# Altium PCB MainPCB.PcbDoc
Units mm, origin at the board's own origin, x right, y up, seen from the top; angles counter-clockwise.
Board outline 84.99 x 84.99 mm, 2 copper layers (Top Layer, Bottom Layer), stack 1.272 mm thick; 46 components, 35 nets, 177 pads, 54 vias.
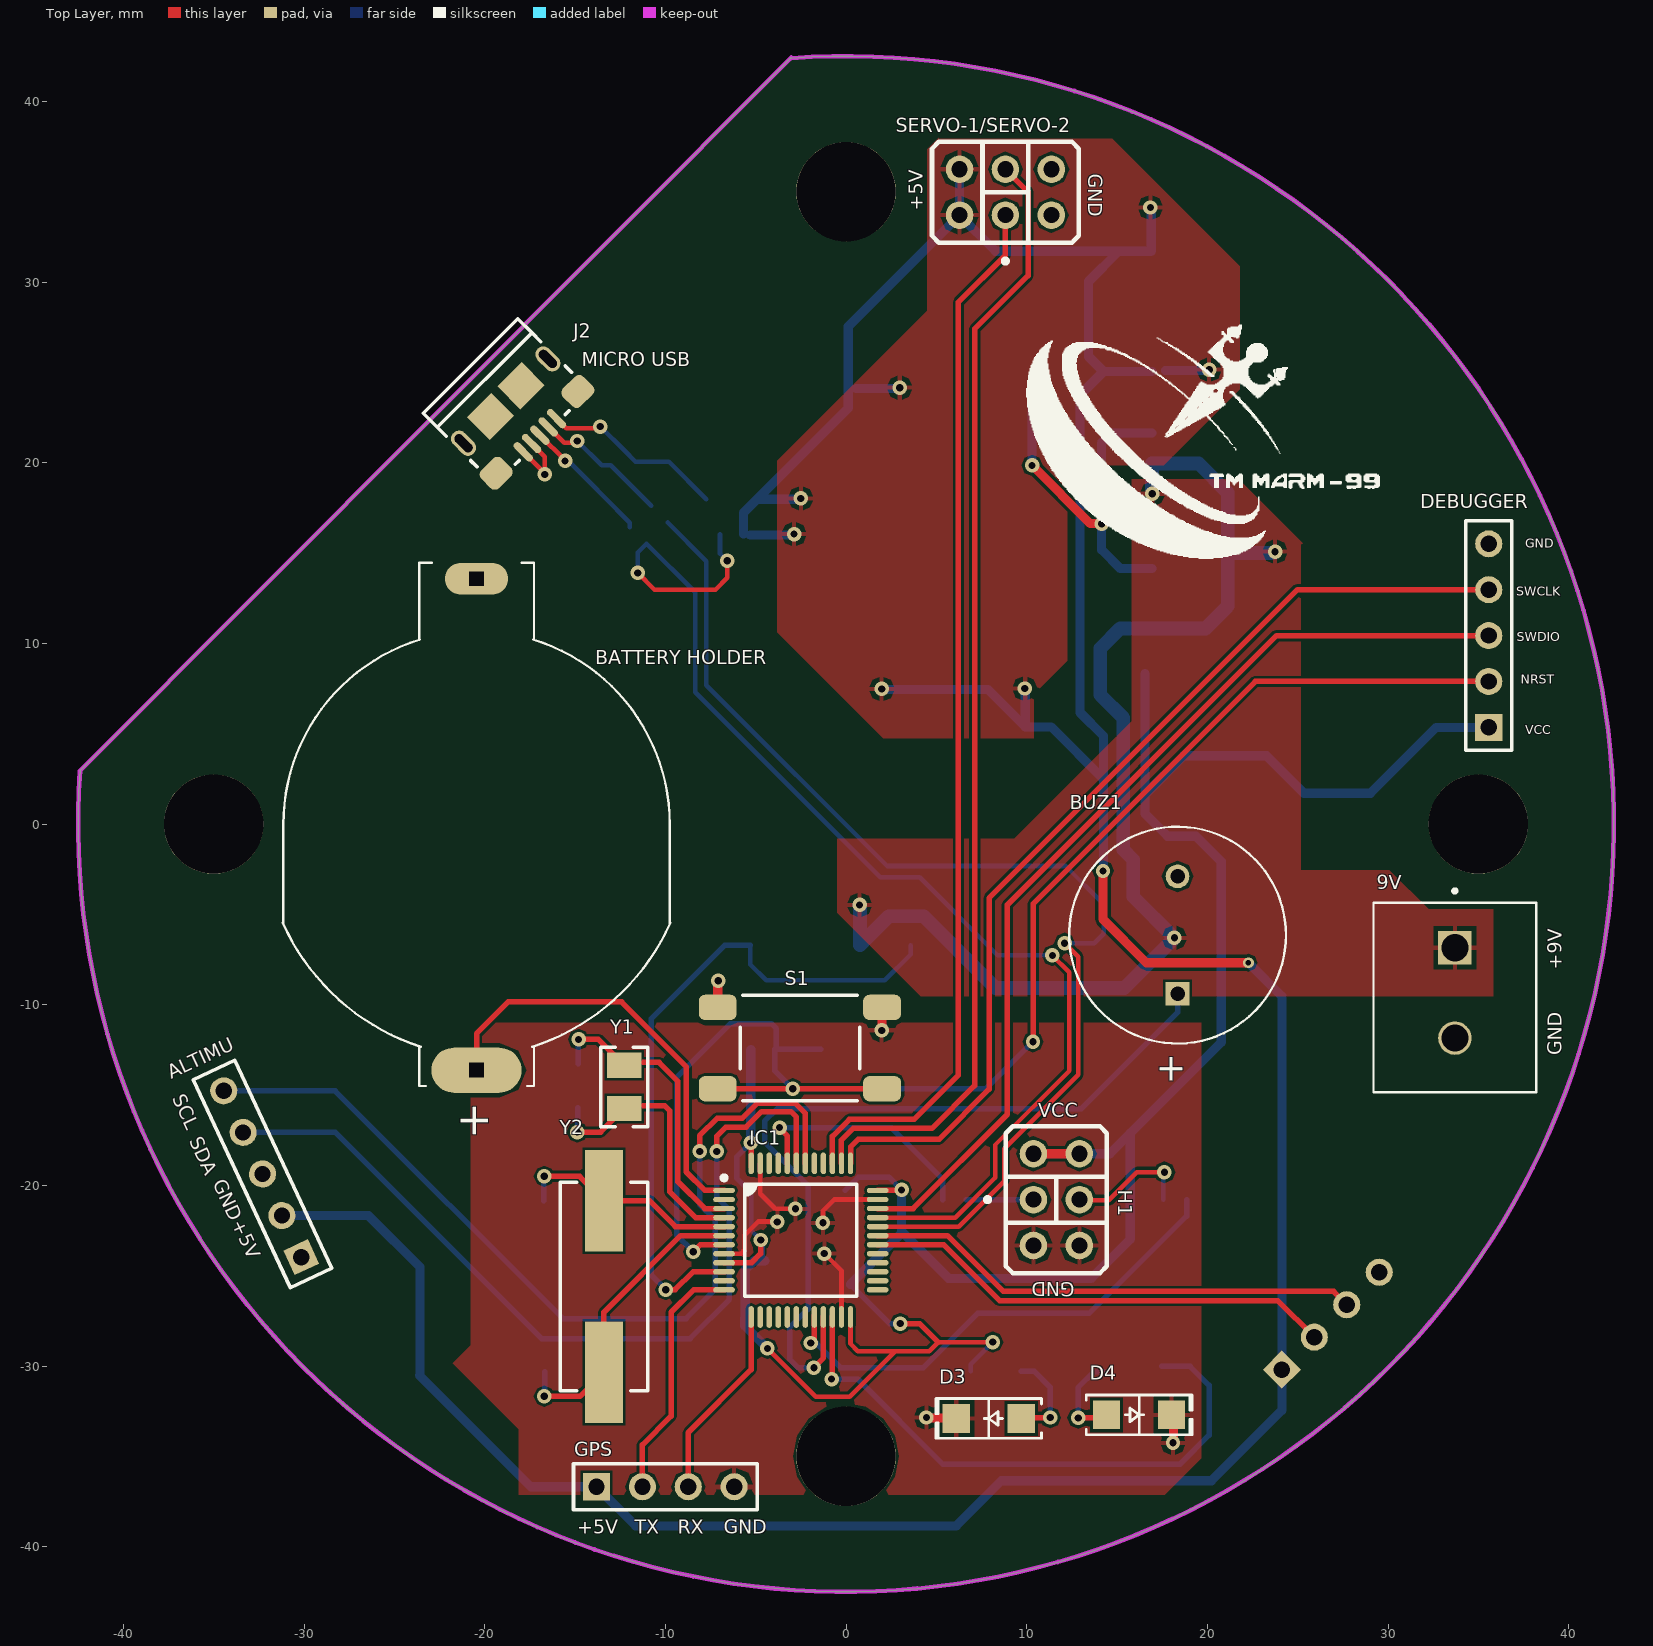
[diagram p0: Top Layer view]
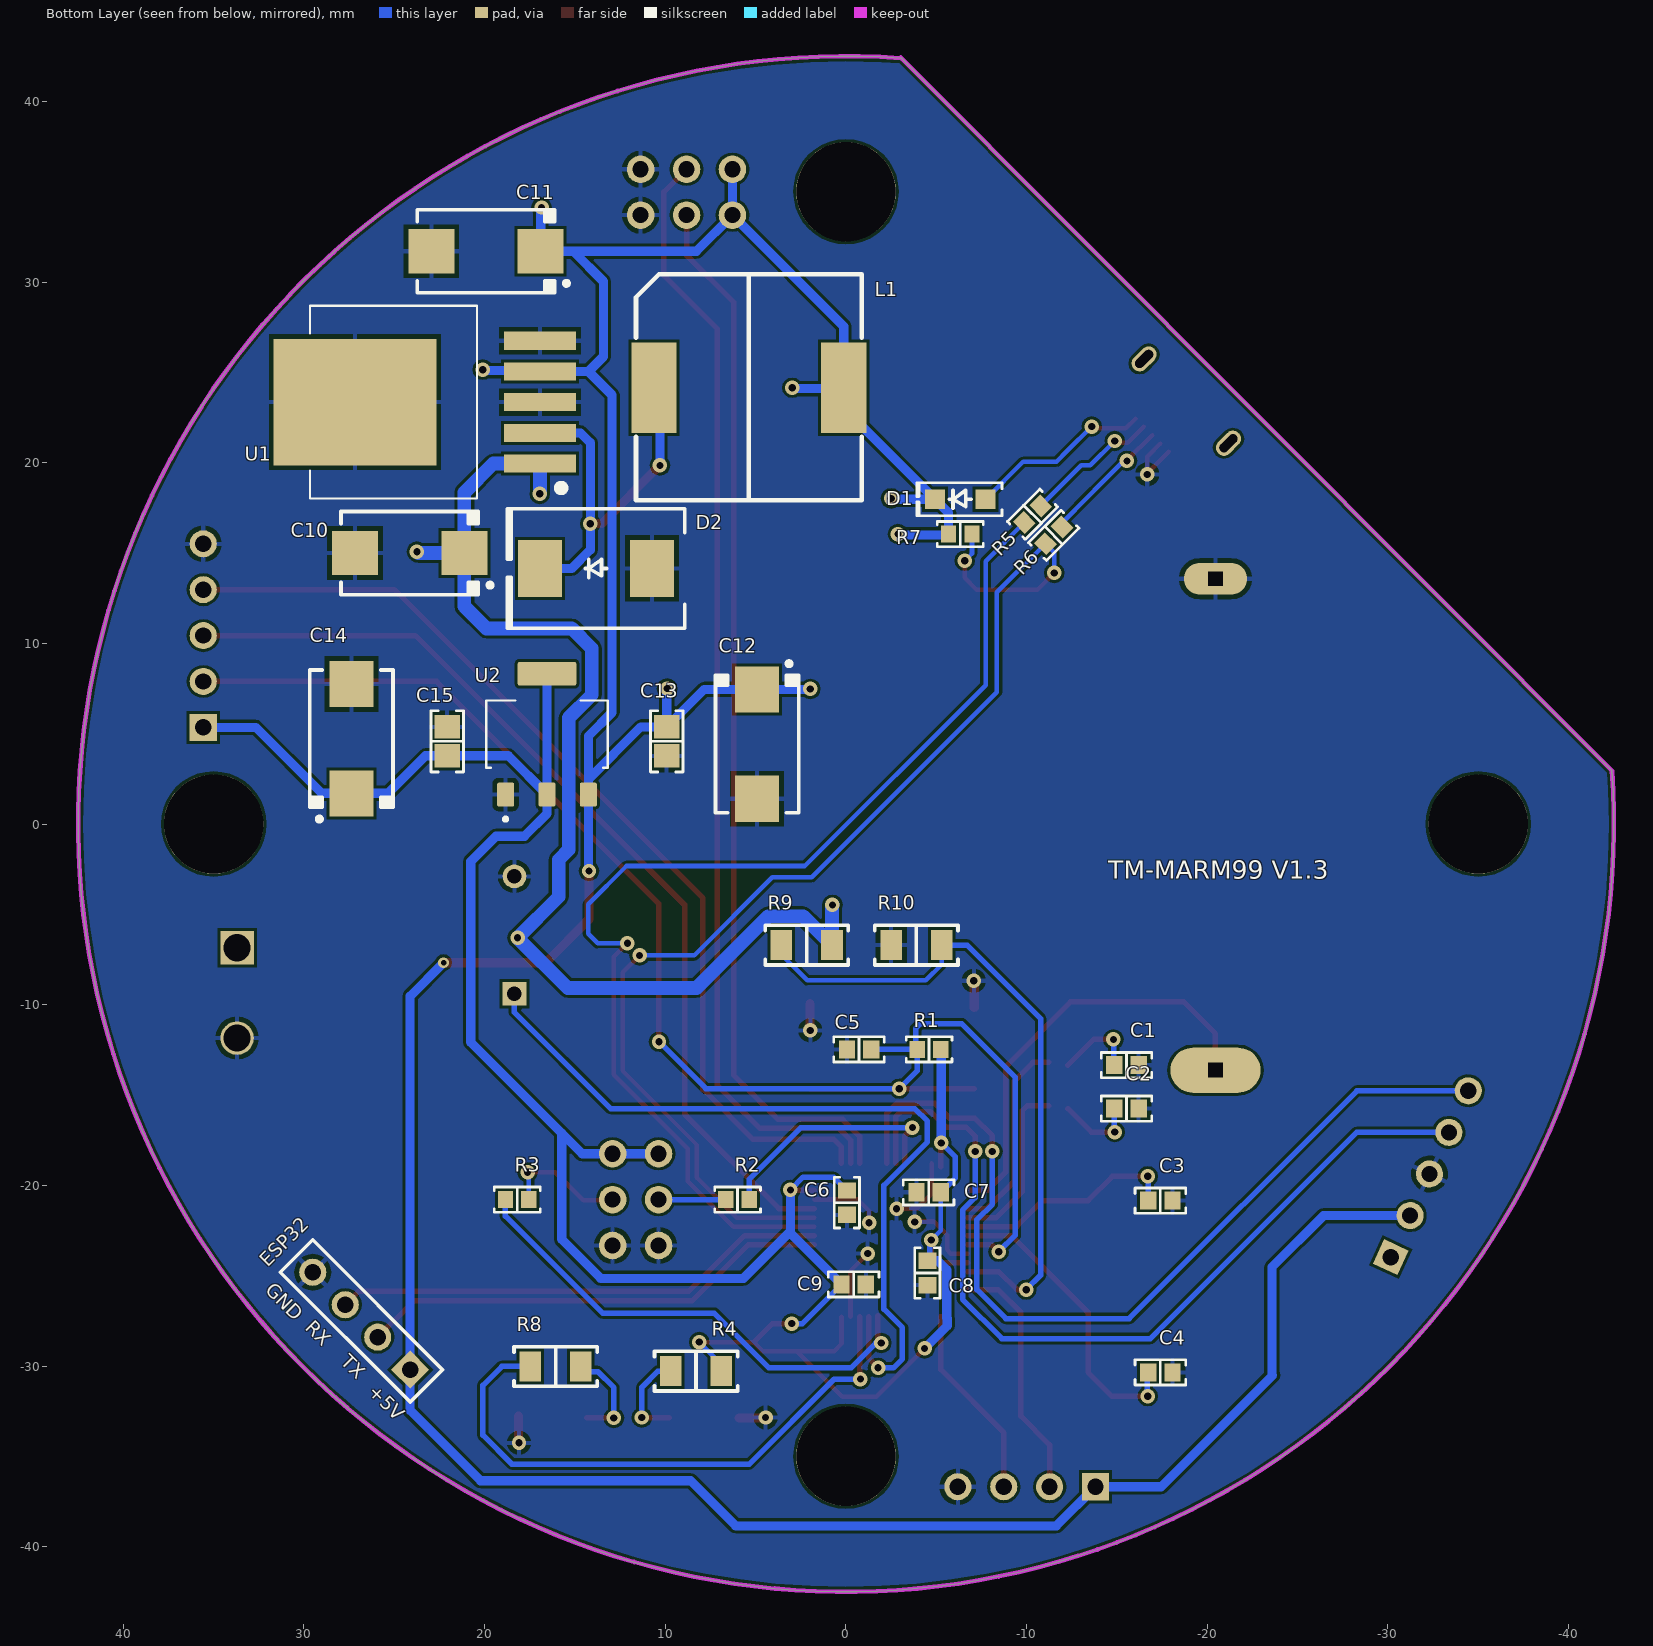
[diagram p1: Bottom Layer view, seen from below]
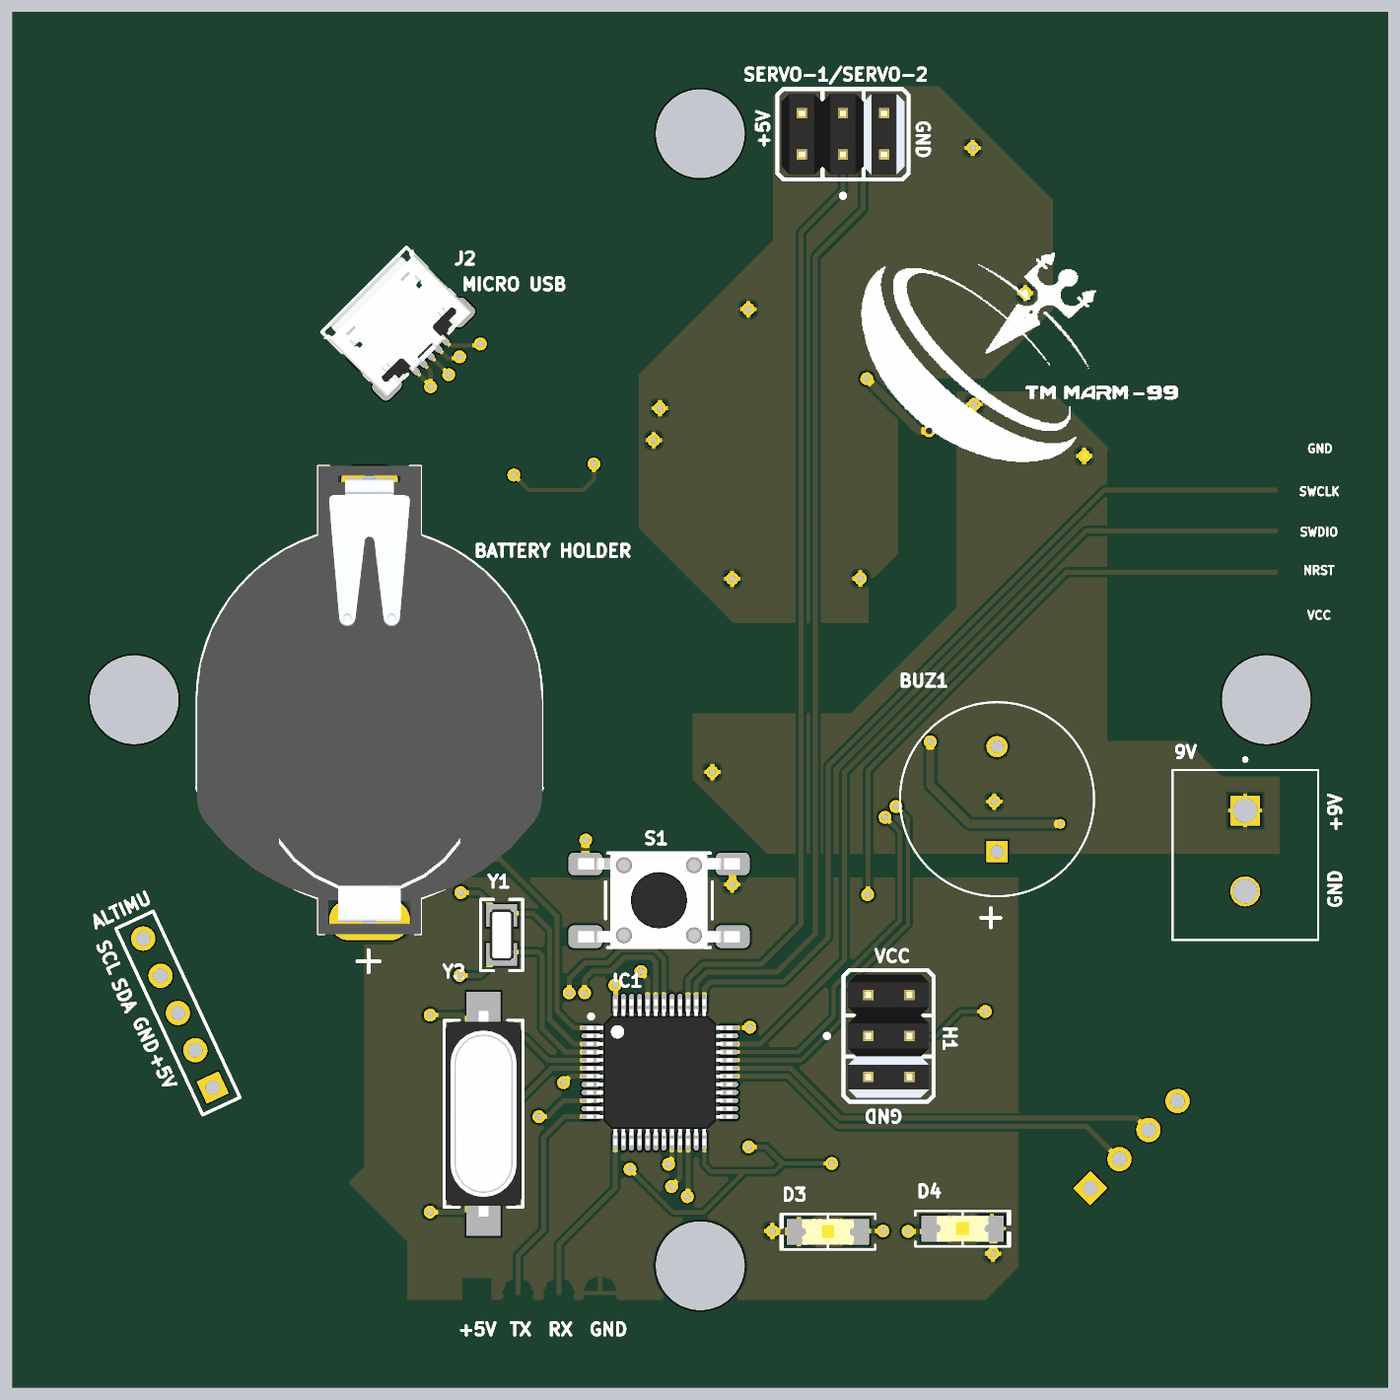
[diagram p2: 3D render of the assembled board from above, using the file's embedded part models]
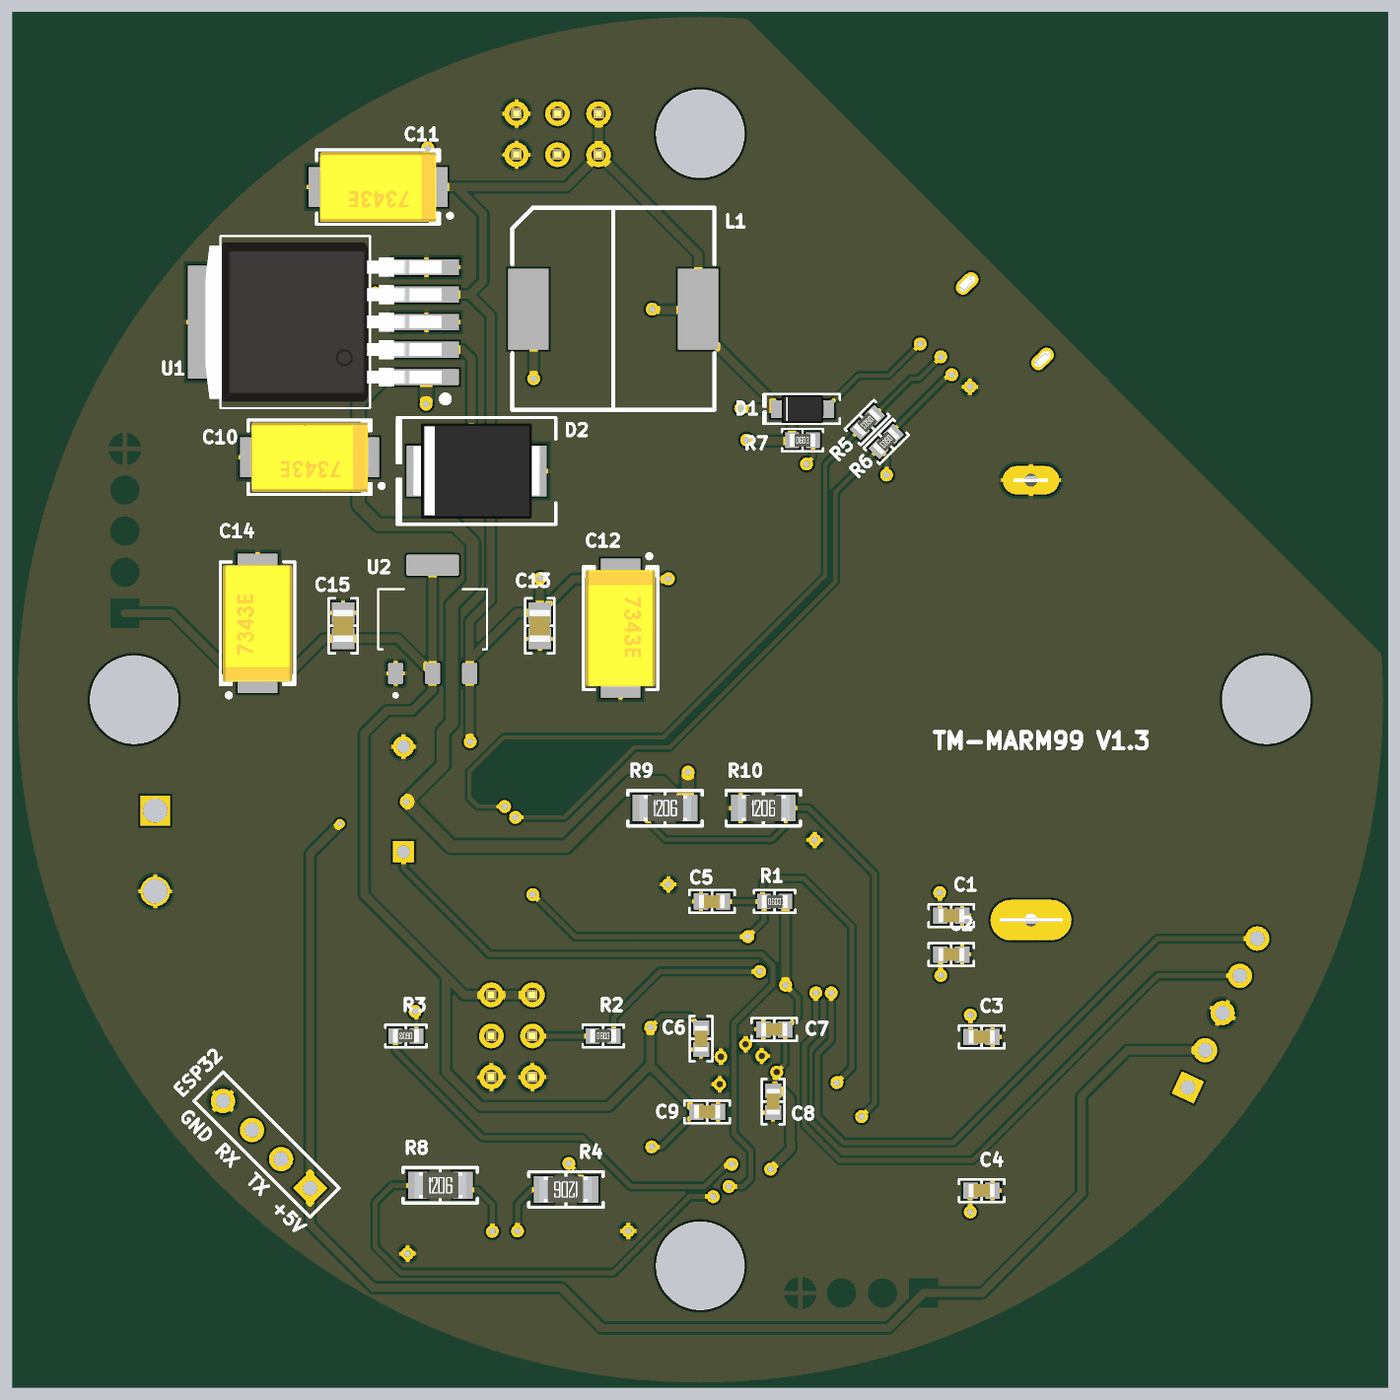
[diagram p3: 3D render of the assembled board from below, using the file's embedded part models]

## Layer stack, top to bottom
Top Solder: solder mask 0.01, Solder Resist, Dk 3.5
Top Layer: signal copper 0.036
Dielectric 1: dielectric 1.2, FR-4, Dk 4.8
Bottom Layer: signal copper 0.036
Bottom Solder: solder mask 0.01, Solder Resist, Dk 3.5

## Board outline
-42.398,2.95 ccw(c0,0) -3.023,42.392 -3.025,42.425

## Design rules (kind name [scope] priority, off if disabled: settings)
Clearance [All] p1: gap=0.152 ignorepadtopadclearanceinfootprint=FALSE
Clearance Polygon_Clearance [InPoly] p2: gap=0.508 ignorepadtopadclearanceinfootprint=FALSE
HoleSize [All] p1: absolutevalues=TRUE maxlimit=5.08 minlimit=0.025 maxpercent=80.000 minpercent=20.000
HoleToHoleClearance [All] p1: gap=0.013 allowstackedmicrovias=TRUE
MinimumSolderMaskSliver [All] p1: minsoldermaskwidth=0.013
PlaneClearance PlaneClearance_1 [All] p1: clearance=0.508
PlaneClearance [All] p2: clearance=1.27
PolygonConnect [All] p1: connectstyle=Relief reliefconductorwidth=0.254 reliefentries=4 polygonreliefangle="90 Angle" airgapwidth=0.254
RoutingVias [All] p1: holewidth=0.4 width=0.8 viastyle="Through Hole" minholewidth=0.1 minwidth=0.2 maxholewidth=0.6 maxwidth=1.2
SilkToSilkClearance [All] p1: silktosilkclearance=0.013
SilkToSolderMaskClearance [IsPad] p1: minsilkscreentomaskgap=0.013 clearancetoexposedcopper=TRUE
SolderMaskExpansion [All] p1: expansion=0.102 istentingtop=FALSE
Width Signal [All] p1: maxlimit=1.27 minlimit=0.203 preferedwidth=0.254 minimp=50.000000 maximp=50.000000 favimp=50.000000
Width [All] p2: maxlimit=0.508 minlimit=0.203 preferedwidth=0.254
24 further rules are at their usual default settings.

## Components (designator, comment, footprint, x,y, rotation, side; value= is the part's Value field where it differs from the comment)
9V "9V TERMINAL" TE_796683-2 33.7,-6.85 r270 top (schematic designator J1)
ALTIMU "ALTIMU" HDR1X5 -30.15,-23.975 r115 top (schematic designator H7)
"BATTERY HOLDER" "BC2032-E2" MPD_BC2032-E2 -20.45,-0.025 r90 top (schematic designator BT)
BUZ1 "MCKPM-G1201A-K4037" XDCR_MCKPM-G1201A-K4037 18.35,-6.15 r90 top
C1 "3.3pF" "CAP 0603_1608" -15.525,-13.35 r0 bottom
C2 "3.3pF" "CAP 0603_1608" -15.525,-15.75 r0 bottom
C3 "27pF" "CAP 0603_1608" -17.4,-20.849 r180 bottom
C4 "27pF" "CAP 0603_1608" -17.4,-30.349 r180 bottom
C5 "0.1µF" "CAP 0603_1608" -0.725,-12.475 r180 bottom
C6 "0.1µF" "CAP 0603_1608" -0.05,-20.959 r90 bottom
C7 "0.1µF" "CAP 0603_1608" -4.575,-20.384 r180 bottom
C8 "0.1µF" "CAP 0603_1608" -4.5,-24.85 r90 bottom
C9 "0.1µF" "CAP 0603_1608" -0.425,-25.484 r0 bottom
C10 "100µF" "CAP POL 2917_7343" 24.15,14.996 r0 bottom
C11 "1000µF" "CAP POL 2917_7343" 19.925,31.704 r0 bottom
C12 "100µF" "CAP POL 2917_7343" 4.925,4.425 r270 bottom
C13 "0.1µF" "CAP 0805_2012" 9.925,4.574 r90 bottom
C14 "330µF" "CAP POL 2917_7343" 27.375,4.724 r90 bottom
C15 "0.1µF" "CAP 0805_2012" 22.075,4.574 r270 bottom
D1 "S110FA" SOD-123W -6.325,17.975 r0 bottom
D2 "B360Q-13-F" "DO214AB SMC" 13.835,14.146 r0 bottom
D3 "Yellow" "LED 1206_3216 YELLOW" 7.9,-32.9 r180 top
D4 "Yellow" "LED 1206_3216 YELLOW" 16.225,-32.7 r0 top
DEBUGGER "DEBUGGER" HDR1X5 35.575,5.35 r90 top (schematic designator H4)
ESP32 "GPS" HDR1X4 24.125,-30.2 r45 bottom (schematic designator H5)
GPS "ESP32" HDR1X4 -13.811,-36.684 r0 top (schematic designator H6)
H1 "2X3 BOOT HDR" "2x3 Male Header" 10.375,-18.25 r0 top
IC1 "STM32F103CBT6" "ST LQFP-48 7X7MM" -2.5,-23.034 r0 top
J2 "10118193-0001LF" "FCI USB 10118193-0001LF" -18.8,23.375 r45 top
L1 "SRI1207" PCBComponent_1 5.375,24.15 r180 bottom
R1 "10 kOhms" "RES 0603_1608" -4.6,-12.475 r180 bottom
R2 "100 kOhms" "RES 0603_1608" 6,-20.79 r180 bottom
R3 "100 kOhms" "RES 0603_1608" 18.2,-20.79 r0 bottom
R4 "510 Ohms" "RES 1206_3216" 8.3,-30.284 r0 bottom
R5 "20 Ohms" "RES 0603_1608" -10.325,17.15 r315 bottom
R6 "20 Ohms" "RES 0603_1608" -11.5,15.975 r315 bottom
R7 "4.7 kOhms" "RES 0603_1608" -6.325,16.05 r180 bottom
R8 "510 Ohms" "RES 1206_3216" 16.075,-30.025 r180 bottom
R9 "2 MOhms" "RES 1206_3216" 2.177,-6.701 r180 bottom
R10 "2 MOhms" "RES 1206_3216" -3.898,-6.701 r180 bottom
S1 "FSM4JSMATR" "TE FSM4JSMA" -2.55,-12.4 r90 top
SERVO-1/SERVO-2 "2X3 SERVO HDR" "2x3 Male Header" 6.285,33.7 r90 top (schematic designator H2)
U1 "LM2576-5.0WU" DPAK6P170_1524X459L254X81N 23.265,23.35 r90 bottom
U2 "AMS1117" SOT229P700X180-4N 16.55,4.975 r90 bottom
Y1 "32.768kHz" "ABRACON ABS07" -12.279,-14.55 r90 top
Y2 "8MHz" "ABRACON ABLS" -13.4,-25.599 r90 top

## Footprints (in the part's own frame and the unit in brackets; to place one, negate y for a bottom-side part, rotate by r counter-clockwise, add the part's x,y. Pads: shape width x height; smd on the part's side, far side on the other; paste and mask are expansions set on the pad)
"2x3 Male Header" [mil]
  round 60 hole 35: 1(0,0) 1(100,0) 2(0,-200) 2(100,-200) 3(0,-100) 4(100,-100)
  silkscreen extent -105,-260 160,60, body extent -48,-250 148,50, height 346
"ABRACON ABLS" [mm] "Crystal, 2-Leads, Body 4.70x11.40mm, Pitch 8.80mm, IPC Medium Density"
  rect 5.6x2.1 smd: 1(-4.75,0) 2(4.75,0)
  silkscreen extent -5.77,-2.43 5.77,2.43, body extent -6.35,-2.35 6.35,2.35, height 4.2
"ABRACON ABS07" [mm] "Crystal, 2-Leads, Body 3.20x1.50mm, IPC Medium Density"
  rect 1.4x1.9 smd: 1(-1.2,0) 2(1.2,0)
  silkscreen extent -2.2,-1.3 2.2,1.3, body extent -1.62,-0.77 1.63,0.78, height 0.9
"CAP 0603_1608" [mm] "Chip Capacitor, 2-Leads, Body 1.60x0.80mm, IPC Medium Density"
  rect 0.9x1 smd: 1(-0.675,0) 2(0.675,0)
  silkscreen extent -1.4,-0.7 1.4,0.7, body extent -0.8,-0.41 0.8,0.41, height 0.82
"CAP 0805_2012" [mm] "Chip Capacitor, 2-Leads, Body 2.00x1.20mm, IPC Medium Density"
  rect 1.3x1.4 smd: 1(-0.8,0) 2(0.8,0)
  silkscreen extent -1.7,-0.9 1.7,0.9, body extent -1,-0.64 1,0.64, height 1.26
"CAP POL 2917_7343" [mm] "Molded Capacitor, 2-Leads, Body 7.30x4.30mm, IPC Medium Density"
  rect 2.55x2.45 smd: 1(-3.025,0) 2(3.025,0)
  silkscreen extent -4.57,-2.3 3.8,2.3, body extent -3.65,-2.15 3.65,2.15, height 4.1
"DO214AB SMC" [mm] "Molded Diode, 2-Leads, Body 6.85x5.90mm, IPC Medium Density"
  rect 2.45x3.15 smd: 1(-3.1,0) 2(3.1,0)
  silkscreen extent -4.9,-3.3 4.9,3.3, body extent -3.97,-2.95 3.97,2.95, height 2.6
DPAK6P170_1524X459L254X81N [mm]
  rect 1x4 smd: 1(-3.4,-6.33) 2(-1.7,-6.33) 3(0,-6.33) 4(1.7,-6.33) 5(3.4,-6.33)
  rect 7x9 smd: 3(0,3.91)
  silkscreen extent -5.33,-7.7 5.33,6.4, body extent -4.91,-7.27 4.91,7.33, height 4.22
"FCI USB 10118193-0001LF" [mm] "USB 2.0 Type B Micro"
  oval 0.4x1.35 smd: 1(1.3,-2.625) 2(0.65,-2.625) 3(0,-2.625) 4(-0.65,-2.625) 5(-1.3,-2.625)
  oval 0.9x1.6 hole 0.5 slot 1.2 at 90 deg: S(-3.3,0.05) S(3.3,0.05)
  rrect50% 1.6x1.4 smd: S(-3.2,-2.4) S(3.2,-2.4)
  rect 1.9x1.8 smd: S(-1.2,0.05) S(1.2,0.05)
  silkscreen extent -3.7,-2.8 3.7,2.8, body extent -3.93,-2.9 3.93,2.76, height 2.78
HDR1X4 [mm] "Connector; Header; 4 Position"
  rect 1.5x1.5 hole 0.9: 1(0,0)
  round 1.5 hole 0.9: 2(2.54,0) 3(5.08,0) 4(7.62,0)
  silkscreen extent -1.27,-1.27 8.89,1.27
HDR1X5 [mm] "Connector; Header; 5 Position"
  rect 1.5x1.5 hole 0.9: 1(0,0)
  round 1.5 hole 0.9: 2(2.54,0) 3(5.08,0) 4(7.62,0) 5(10.16,0)
  silkscreen extent -1.27,-1.27 11.43,1.27
"LED 1206_3216 YELLOW" [mm] "Chip Diode, 2-Leads, Body 3.13x1.55mm, IPC Medium Density"
  rect 1.5x1.6 smd: 1(-1.8,0) 2(1.8,0)
  silkscreen extent -2.92,-1.1 2.92,1.1, body extent -1.6,-0.8 1.6,0.8, height 0.9
MPD_BC2032-E2 [mm]
  oval 1.75x3.5 hole 0.8 square: N(13.6,0)
  oval 2.5x5 hole 0.8 square: P(-13.6,0)
  silkscreen extent -14.48,-10.73 14.48,10.73, body extent -14.48,-10.67 14.48,10.67, height 5.66
PCBComponent_1 [mm]
  rect 2.5x5 smd: 1(-5.25,0) 2(5.25,0)
  silkscreen extent -6.25,-6.23 6.25,6.27
"RES 0603_1608" [mm] "Chip Resistor, 2-Leads, Body 1.60x0.80mm, IPC Medium Density"
  rect 0.85x0.95 smd: 1(-0.65,0) 2(0.65,0)
  silkscreen extent -1.27,-0.7 1.27,0.7, body extent -0.8,-0.4 0.8,0.4, height 0.45
"RES 1206_3216" [mm] "Chip Resistor, 2-Leads, Body 3.13x1.55mm, IPC Medium Density"
  rect 1.2x1.65 smd: 1(-1.4,0) 2(1.4,0)
  silkscreen extent -2.3,-1.1 2.3,1.1, body extent -1.58,-0.8 1.62,0.8, height 0.6
SOD-123W [mm] "SODFL, 2-Leads, Body 1.60x3.50mm, IPC Medium Density"
  rect 1.1x1.1 smd: 1(-1.4,0) 2(1.4,0)
  silkscreen extent -2.31,-0.92 2.41,0.92, body extent -1.75,-0.87 1.75,0.87, height 0.95
SOT229P700X180-4N [mm]
  rrect15% 1.31x0.93 smd: 1(-3.345,2.29) 2(-3.345,0) 3(-3.345,-2.29)
  rrect15% 1.31x3.24 smd: 4(3.345,0)
  silkscreen extent -4.8,-3.36 1.86,3.36
"ST LQFP-48 7X7MM" [mm] "LQFP, 48-Leads, Body 7.00x7.00mm, Pitch 0.50mm, IPC Medium Density"
  oval 1.2x0.3 smd: 1(-4.25,2.75) 2(-4.25,2.25) 3(-4.25,1.75) 4(-4.25,1.25) 5(-4.25,0.75) 6(-4.25,0.25) 7(-4.25,-0.25) 8(-4.25,-0.75) 9(-4.25,-1.25) 10(-4.25,-1.75) 11(-4.25,-2.25) 12(-4.25,-2.75) 25(4.25,-2.75) 26(4.25,-2.25) 27(4.25,-1.75) 28(4.25,-1.25) 29(4.25,-0.75) 30(4.25,-0.25) 31(4.25,0.25) 32(4.25,0.75) 33(4.25,1.25) 34(4.25,1.75) 35(4.25,2.25) 36(4.25,2.75)
  oval 0.3x1.2 smd: 13(-2.75,-4.25) 14(-2.25,-4.25) 15(-1.75,-4.25) 16(-1.25,-4.25) 17(-0.75,-4.25) 18(-0.25,-4.25) 19(0.25,-4.25) 20(0.75,-4.25) 21(1.25,-4.25) 22(1.75,-4.25) 23(2.25,-4.25) 24(2.75,-4.25) 37(2.75,4.25) 38(2.25,4.25) 39(1.75,4.25) 40(1.25,4.25) 41(0.75,4.25) 42(0.25,4.25) 43(-0.25,4.25) 44(-0.75,4.25) 45(-1.25,4.25) 46(-1.75,4.25) 47(-2.25,4.25) 48(-2.75,4.25)
  silkscreen extent -4.37,-3.1 3.1,3.57, body extent -4.51,-4.51 4.51,4.51, height 1.55
"TE FSM4JSMA" [mm]
  rrect50% 1.4x2.1 smd: 1(2.25,4.55) 2(2.25,-4.55) 3(-2.25,4.55) 4(-2.25,-4.55)
  silkscreen extent -2.92,-3.3 2.92,3.3, body extent -3,-5 3,5, height 5.08
TE_796683-2 [mm]
  rect 1.85x1.85 hole 1.5: 1(0,0)
  round 1.85 hole 1.5: 2(5,0)
  silkscreen extent -3.25,-4.5 8,4.5
XDCR_MCKPM-G1201A-K4037 [mm]
  rect 1.308x1.308 hole 0.8: 1(-3.25,0)
  round 1.308 hole 0.8: 2(3.25,0)
  silkscreen extent -6,-6 6,6

## Part data
9V: library part 796683-2, "Wire to Board 2 Position 5 mm Pitch 30-12 AWG Euro Style Terminal Block", Package=None, Availability=Unavailable, MF="TE Connectivity", MP=796683-2, Price=None, SnapEDA_Link=https://www.snapeda.com/parts/796683-2/TE%20Connectivity/view-part/2873073/?ref=snap, TE_purchase_URL=https://www.te.com/usa-en/product-796683-2.html?te_bu=Cor&te_type=disp&te_campaign=seda_glo_cor-seda-global-disp-prtnr-fy19-seda-model-bom-cta_sma-317_1&elqCampaignId=32493
ALTIMU DEBUGGER: library part "Header 5", "1x5 2.54mm Male Header", LatestRevisionDate=17-Jul-2002, LatestRevisionNote="Re-released for DXP Platform.", Publisher="Altium Limited"
"BATTERY HOLDER": "BATTERY HOLDER COIN 20MM PC PIN", Package=None, Availability=Unavailable, MF="MPD _Memory", MP=BC2032-E2, Price=None, SnapEDA_Link=https://www.snapeda.com/parts/BC2032-E2/MPD%20%28Memory%20Protection%20Devices%29/view-part/4219598/?ref=snap
BUZ1: "Zumbador y transductor magnÃ©ticos", Package=None, Availability=Unavailable, MF=Multicomp, MP=MCKPM-G1201A-K4037, Price=None, SnapEDA_Link=https://www.snapeda.com/parts/MCKPM-G1201A-K4037/Multicomp/view-part/231709/?ref=snap
C1 C2: library part 06035U3R3CAT2A, "CAP CER 3.3PF 50V NP0 0603", Device Package="0603 (1608 Metric)", Manufacturer="AVX Corporation", Operating Temperature="-55°C ~ 125°C", Supplier Part Number 1=478-12739-1-ND, Temperature Coefficient="C0G, NP0", Tolerance=±0.25pF, Voltage - Rated=50V, Applications="RF, Microwave, High Frequency", Capacitance=3.3pF, ComponentLink1Description=Datasheet, ComponentLink1URL=http://datasheets.avx.com/U-Series.pdf, ComponentLink2Description="DigiKey Link", ComponentLink2URL=http://digikey.com/product-detail/en/avx-corporation/06035U3R3CAT2A/478-12739-1-ND/9949267, Features="Ultra Low ESR", LastUpdated="2.09.2020 01:03:19", Lifecycle Status=Active, Minimum Order=1, Mounting Type="Surface Mount, MLCC", Package / Case="0603 (1608 Metric)", Packaging=TapeAndReel, Part Number=06035U3R3CAT2A, Part Status=Active, PartId=11763, Price=0.06, Series=U, Size / Dimension="0.060\" L x 0.030\" W (1.52mm x 0.76mm)", Supplier 1=DigiKey, Thickness (Max)="0.036\" (0.91mm)"
C3 C4: library part 600S270FW250XT, "CAP CER 27PF 250V NP0 0603", Device Package="0603 (1608 Metric)", Manufacturer="American Technical Ceramics", Operating Temperature="-55°C ~ 125°C", Supplier Part Number 1=1284-1876-1-ND, Temperature Coefficient="C0G, NP0", Tolerance=±1%, Voltage - Rated=250V, Applications="RF, Microwave, High Frequency, Bypass, Decoupling", Capacitance=27pF, ComponentLink1Description=Datasheet, ComponentLink1URL=http://www.atceramics.com/UserFiles/600s.pdf, ComponentLink2Description="DigiKey Link", ComponentLink2URL=http://digikey.com/product-detail/en/american-technical-ceramics/600S270FW250XT/1284-1876-1-ND/8269410, Features="High Q, Low Loss, Ultra Low ESR", LastUpdated="2.09.2020 01:03:27", Lifecycle Status=Active, Minimum Order=1, Mounting Type="Surface Mount, MLCC", Package / Case="0603 (1608 Metric)", Packaging=TapeAndReel, Part Number=600S270FW250XT, Part Status=Active, PartId=7201, Price=0.49, Series="ATC 600S", Size / Dimension="0.063\" L x 0.032\" W (1.60mm x 0.81mm)", Supplier 1=DigiKey, Thickness (Max)="0.035\" (0.89mm)"
C5 C6 C7 C8 C9: library part 885012206071, "CAP CER 0.1UF 25V X7R 0603", Device Package="0603 (1608 Metric)", Manufacturer="Würth Elektronik", Operating Temperature="-55°C ~ 125°C", Supplier Part Number 1=732-7989-1-ND, Temperature Coefficient=X7R, Tolerance=±10%, Voltage - Rated=25V, Applications="General Purpose", Capacitance=0.1µF, ComponentLink1Description=Datasheet, ComponentLink1URL=https://katalog.we-online.de/pbs/datasheet/885012206071.pdf, ComponentLink2Description="DigiKey Link", ComponentLink2URL=http://digikey.com/product-detail/en/w-rth-elektronik/885012206071/732-7989-1-ND/5454616, LastUpdated="2.09.2020 01:03:30", Lifecycle Status=Active, Minimum Order=1, Mounting Type="Surface Mount, MLCC", Package / Case="0603 (1608 Metric)", Packaging=TapeAndReel, Part Number=885012206071, Part Status=Active, PartId=5665, Price=0.02, Series=WCAP-CSGP, Size / Dimension="0.063\" L x 0.031\" W (1.60mm x 0.80mm)", Supplier 1=DigiKey, Thickness (Max)="0.037\" (0.95mm)"
C10: library part T495X107K016ATE080, "CAP TANT 100UF 10% 16V 2917", Device Package="2917 (7343 Metric)", ESR (Equivalent Series Resistance)=80mOhm, Lifetime @ Temp.="2000 Hrs @ 85°C", Manufacturer=KEMET, Manufacturer Size Code=X, Operating Temperature="-55°C ~ 125°C", Supplier Part Number 1=399-10399-1-ND, Tolerance=±10%, Voltage - Rated=16V, Capacitance=100µF, ComponentLink1Description=Datasheet, ComponentLink1URL=https://api.kemet.com/component-edge/download/datasheet/T495X107K016ATE080.pdf, ComponentLink2Description="DigiKey Link", ComponentLink2URL=http://digikey.com/product-detail/en/kemet/T495X107K016ATE080/399-10399-1-ND/3880218, Features="General Purpose", Height - Seated (Max)="0.169\" (4.30mm)", LastUpdated="2.09.2020 01:16:13", Lifecycle Status=Active, Minimum Order=1, Mounting Type="Surface Mount", Package / Case="2917 (7343 Metric)", Packaging=TapeAndReel, Part Number=T495X107K016ATE080, Part Status=Active, PartId=2918, Price=1.26, Series=T495, Size / Dimension="0.287\" L x 0.169\" W (7.30mm x 4.30mm)", Supplier 1=DigiKey, Type=Molded
C11: library part T491X108K006AT, "CAP TANT 1000UF 10% 6.3V 2917", Device Package="2917 (7343 Metric)", ESR (Equivalent Series Resistance)=600mOhm, Lifetime @ Temp.="2000 Hrs @ 125°C", Manufacturer=KEMET, Manufacturer Size Code=X, Operating Temperature="-55°C ~ 125°C", Supplier Part Number 1=399-5123-1-ND, Tolerance=±10%, Voltage - Rated=6.3V, Capacitance=1000µF, ComponentLink1Description=Datasheet, ComponentLink1URL=https://api.kemet.com/component-edge/download/datasheet/T491X108K006AT.pdf, ComponentLink2Description="DigiKey Link", ComponentLink2URL=http://digikey.com/product-detail/en/kemet/T491X108K006AT/399-5123-1-ND/1681767, Features="General Purpose", Height - Seated (Max)="0.169\" (4.30mm)", LastUpdated="2.09.2020 01:16:11", Lifecycle Status=Active, Minimum Order=1, Mounting Type="Surface Mount", Package / Case="2917 (7343 Metric)", Packaging=TapeAndReel, Part Number=T491X108K006AT, Part Status=Active, PartId=3349, Price=2.10, Series=T491, Size / Dimension="0.287\" L x 0.169\" W (7.30mm x 4.30mm)", Supplier 1=DigiKey, Type=Molded
C12: library part TR3D107K020C0080, "CAP TANT 100UF 10% 20V 2917", Device Package="2917 (7343 Metric)", ESR (Equivalent Series Resistance)=80mOhm, Manufacturer="Vishay Sprague", Manufacturer Size Code=D, Operating Temperature="-55°C ~ 125°C", Supplier Part Number 1=718-1774-1-ND, Tolerance=±10%, Voltage - Rated=20V, Capacitance=100µF, ComponentLink1Description=Datasheet, ComponentLink1URL=http://www.vishay.com/docs/40080/tr3.pdf, ComponentLink2Description="DigiKey Link", ComponentLink2URL=http://digikey.com/product-detail/en/vishay-sprague/TR3D107K020C0080/718-1774-1-ND/2260028, Features="General Purpose", Height - Seated (Max)="0.122\" (3.10mm)", LastUpdated="2.09.2020 01:16:12", Lifecycle Status=Active, Minimum Order=1, Mounting Type="Surface Mount", Package / Case="2917 (7343 Metric)", Packaging=TapeAndReel, Part Number=TR3D107K020C0080, Part Status=Active, PartId=3089, Price=0.61, Series="TANTAMOUNT®, TR3", Size / Dimension="0.287\" L x 0.169\" W (7.30mm x 4.30mm)", Supplier 1=DigiKey, Type=Molded
C13 C15: library part AC0805KKX8R9BB104, "CAP CER 0805 10% X8R 50V 100NF", Device Package="0805 (2012 Metric)", Manufacturer=Yageo, Operating Temperature="-55°C ~ 150°C", Ratings=AEC-Q200, Supplier Part Number 1=311-4624-1-ND, Temperature Coefficient=X8R, Tolerance=±10%, Voltage - Rated=50V, Applications=Automotive, Capacitance=0.1µF, ComponentLink1Description=Datasheet, ComponentLink1URL=http://www.yageo.com/documents/recent/AC0805KKX8R9BB104.pdf, ComponentLink2Description="DigiKey Link", ComponentLink2URL=http://digikey.com/product-detail/en/yageo/AC0805KKX8R9BB104/311-4624-1-ND/9699550, LastUpdated="2.09.2020 01:04:20", Lifecycle Status=Active, Minimum Order=1, Mounting Type="Surface Mount, MLCC", Package / Case="0805 (2012 Metric)", Packaging=TapeAndReel, Part Number=AC0805KKX8R9BB104, Part Status=Active, PartId=14076, Price=0.06, Series=AC, Size / Dimension="0.079\" L x 0.049\" W (2.00mm x 1.25mm)", Supplier 1=DigiKey, Thickness (Max)="0.057\" (1.45mm)"
C14: library part T494D337K006AT, "CAP TANT 330UF 10% 6.3V 2917", Device Package="2917 (7343 Metric)", ESR (Equivalent Series Resistance)=150mOhm, Lifetime @ Temp.="2000 Hrs @ 125°C", Manufacturer=KEMET, Manufacturer Size Code=D, Operating Temperature="-55°C ~ 125°C", Supplier Part Number 1=399-10434-1-ND, Tolerance=±10%, Voltage - Rated=6.3V, Capacitance=330µF, ComponentLink1Description=Datasheet, ComponentLink1URL=https://api.kemet.com/component-edge/download/datasheet/T494D337K006AT.pdf, ComponentLink2Description="DigiKey Link", ComponentLink2URL=http://digikey.com/product-detail/en/kemet/T494D337K006AT/399-10434-1-ND/3907839, Features="General Purpose", Height - Seated (Max)="0.122\" (3.10mm)", LastUpdated="2.09.2020 01:16:17", Lifecycle Status=Active, Minimum Order=1, Mounting Type="Surface Mount", Package / Case="2917 (7343 Metric)", Packaging=TapeAndReel, Part Number=T494D337K006AT, Part Status=Active, PartId=2266, Price=2.20, Series=T494, Size / Dimension="0.287\" L x 0.169\" W (7.30mm x 4.30mm)", Supplier 1=DigiKey, Type=Molded
D1: "DIODE SCHOTTKY 100V 1A SOD123FA", Capacitance @ Vr, F="55pF @ 4V, 1MHz", Current - Average Rectified (Io)=1A, Current - Reverse Leakage @ Vr="50µA @ 100V", Manufacturer="ON Semiconductor", Operating Temperature - Junction="-55°C ~ 150°C", Package / Case=SOD-123W, Supplier Device Package=SOD-123FA, Supplier Part Number 1=S110FACT-ND, Voltage - DC Reverse (Vr) (Max)=100V, Voltage - Forward (Vf) (Max) @ If="800mV @ 1A", ComponentLink1Description=Datasheet, ComponentLink1URL=https://www.onsemi.com/pub/Collateral/S110FA-D.pdf, ComponentLink2Description="DigiKey Link", ComponentLink2URL=http://digikey.com/product-detail/en/on-semiconductor/S110FA/S110FACT-ND/5892121, Diode Type=Schottky, LastUpdated="2.09.2020 01:30:30", Lifecycle Status=Active, Minimum Order=1, Mounting Type="Surface Mount", Packaging=TapeAndReel, Part Number=S110FA, Part Status=Active, PartId=3121, Price=0.07, Series="Automotive, AEC-Q101", Speed="Fast Recovery =< 500ns, > 200mA (Io)", Supplier 1=DigiKey
D2: "DIODE SCHOTTKY 60V 3A SMC", Capacitance @ Vr, F="200pF @ 4V, 1MHz", Current - Average Rectified (Io)=3A, Current - Reverse Leakage @ Vr="500µA @ 60V", Manufacturer="Diodes Incorporated", Operating Temperature - Junction="-55°C ~ 150°C", Package / Case="DO-214AB, SMC", Supplier Device Package=SMC, Supplier Part Number 1=B360Q-13-FDICT-ND, Voltage - DC Reverse (Vr) (Max)=60V, Voltage - Forward (Vf) (Max) @ If="700mV @ 3A", ComponentLink1Description=Datasheet, ComponentLink1URL=https://www.diodes.com/assets/Datasheets/B320Q-B360Q.pdf, ComponentLink2Description="DigiKey Link", ComponentLink2URL=http://digikey.com/product-detail/en/diodes-incorporated/B360Q-13-F/B360Q-13-FDICT-ND/6012769, Diode Type=Schottky, LastUpdated="2.09.2020 01:18:57", Lifecycle Status=Active, Minimum Order=1, Mounting Type="Surface Mount", Packaging=TapeAndReel, Part Number=B360Q-13-F, Part Status=Active, PartId=1652, Price=0.16, Series="Automotive, AEC-Q101", Speed="Fast Recovery =< 500ns, > 200mA (Io)", Supplier 1=DigiKey
D3 D4: library part FKY1105W-TR, "LED YELLOW CLEAR SMD", Current - Test=20mA, Device Package="1206 (3216 Metric)", Lens Color=Colorless, Manufacturer="Stanley Electric Co", Millicandela Rating=2850mcd, Supplier Device Package="3216 (1206)", Supplier Part Number 1=404-1272-1-ND, Voltage - Forward (Vf) (Typ)=2.2V, Color=Yellow, ComponentLink1Description=Datasheet, ComponentLink1URL=http://www.stanley-components.com/php/downloaddatafile.php?rp=0,FKY1105W-TR_e.pdf, ComponentLink2Description="DigiKey Link", ComponentLink2URL=http://digikey.com/product-detail/en/stanley-electric-co/FKY1105W-TR/404-1272-1-ND/9477277, Configuration=Standard, Height (Max)=2.05mm, LastUpdated="2.09.2020 01:21:25", Lens Size="1.60mm Dia", Lens Style="Round with Domed Top", Lens Transparency=Clear, Lifecycle Status=Active, Minimum Order=1, Mounting Type="Surface Mount", Package / Case="1206 (3216 Metric)", Packaging=TapeAndReel, Part Number=FKY1105W-TR, Part Status=Active, PartId=35, Price=0.14, Series=1105W, Size / Dimension="3.20mm L x 1.60mm W", Supplier 1=DigiKey, Wavelength - Dominant=589nm, Wavelength - Peak=595nm
ESP32 GPS: library part "Header 4", "1x4 2.54mm Male Header", LatestRevisionDate=17-Jul-2002, LatestRevisionNote="Re-released for DXP Platform.", Publisher="Altium Limited"
IC1: "IC MCU 32BIT 128KB FLASH 48LQFP", Device Package=48-LQFP, Manufacturer=STMicroelectronics, Operating Temperature="-40°C ~ 85°C (TA)", Supplier Part Number 1=497-6288-ND, Voltage - Supply (Vcc/Vdd)="2V ~ 3.6V", ComponentLink1Description=Datasheet, ComponentLink1URL=https://www.st.com/resource/en/datasheet/stm32f103cb.pdf, ComponentLink2Description="DigiKey Link", ComponentLink2URL=http://digikey.com/product-detail/en/stmicroelectronics/STM32F103CBT6/497-6288-ND/1754420, Connectivity="CANbus, I²C, IrDA, LINbus, SPI, UART/USART, USB", Core Processor="ARM® Cortex®-M3", Core Size=32-Bit, Data Converters="A/D 10x12b", LastUpdated="24.05.2020 22:49:18", Lifecycle Status=Active, Minimum Order=1, Mounting Type="Surface Mount", Number of I/O=37, Oscillator Type=Internal, Package / Case=48-LQFP, Packaging=Tray, Part Number=STM32F103CBT6, Part Status=Active, PartId=194, Peripherals="DMA, Motor Control PWM, PDR, POR, PVD, PWM, Temp Sensor, WDT", Price=5.25, Program Memory Size="128KB (128K x 8)", Program Memory Type=FLASH, RAM Size="20K x 8", Series=STM32F1, Speed=72MHz, Supplier 1=DigiKey
J2: "CONN RCPT USB2.0 MICRO B SMD R/A", Current Rating (Amps)="1.8A per Contact", Manufacturer="Amphenol ICC (FCI)", Operating Temperature="-30°C ~ 80°C", Supplier Part Number 1=609-4616-2-ND, Voltage - Rated=100VAC, ComponentLink1Description=Datasheet, ComponentLink1URL=https://cdn.amphenol-icc.com/media/wysiwyg/files/documentation/datasheet/inputoutput/io_usb_micro.pdf, ComponentLink2Description="DigiKey Link", ComponentLink2URL=//digikey.com/product-detail/en/amphenol-icc-fci/10118193-0001LF/609-4616-2-ND/2785388, Connector Type="USB - micro B", Features="Solder Retention", Gender=Receptacle, LastUpdated="9.12.2019 20:51:28", Lifecycle Status=0, Mating Cycles=10000, Minimum Order=1, Mounting Feature=Horizontal, Mounting Type="Surface Mount, Right Angle; Through Hole", Number of Contacts=5, Number of Ports=1, Packaging=TapeAndReel, Part Number=10118193-0001LF, Part Status=Active, Price=0.21, Series=-, Shielding=Shielded, Specifications="USB 2.0", Supplier 1=DigiKey, Termination=Solder
R1: library part RS73F1JTTD1002B, "RES 10K OHM 0.1% 1/5W 0603", Device Package="0603 (1608 Metric)", Manufacturer="KOA Speer Electronics, Inc.", Operating Temperature="-55°C ~ 155°C", Power (Watts)="0.2W, 1/5W", Ratings=AEC-Q200, Supplier Device Package=0603, Supplier Part Number 1=2019-RS73F1JTTD1002BCT-ND, Temperature Coefficient=±25ppm/°C, Tolerance=±0.1%, ComponentLink1Description=Datasheet, ComponentLink1URL=http://www.koaspeer.com/pdfs/RS73.pdf, ComponentLink2Description="DigiKey Link", ComponentLink2URL=http://digikey.com/product-detail/en/koa-speer-electronics-inc/RS73F1JTTD1002B/2019-RS73F1JTTD1002BCT-ND/11594458, Composition="Thick Film", Features="Automotive AEC-Q200, Moisture Resistant", LastUpdated="2.09.2020 01:09:22", Lifecycle Status=Active, Minimum Order=1, Number of Terminations=2, Package / Case="0603 (1608 Metric)", Packaging=Unknown, Part Number=RS73F1JTTD1002B, Part Status=Active, PartId=56378, Price=0.08, Resistance="10 kOhms", Series=RS73, Supplier 1=DigiKey
R2 R3: library part MCT06030D1003DP500, "RES SMD 100K OHM 0.5% 1/8W 0603", Device Package="0603 (1608 Metric)", Manufacturer="Vishay Beyschlag", Operating Temperature="-55°C ~ 155°C", Power (Watts)="0.125W, 1/8W", Supplier Device Package=0603, Supplier Part Number 1=749-1697-1-ND, Temperature Coefficient=±25ppm/°C, Tolerance=±0.5%, ComponentLink1Description=Datasheet, ComponentLink1URL=http://www.vishay.com/docs/28705/mcx0x0xpro.pdf, ComponentLink2Description="DigiKey Link", ComponentLink2URL=http://digikey.com/product-detail/en/vishay-beyschlag/MCT06030D1003DP500/749-1697-1-ND/7348005, Composition="Thin Film", Features=Anti-Sulfur, Height - Seated (Max)="0.022\" (0.55mm)", LastUpdated="2.09.2020 01:10:10", Lifecycle Status=Active, Minimum Order=1, Number of Terminations=2, Package / Case="0603 (1608 Metric)", Packaging=TapeAndReel, Part Number=MCT06030D1003DP500, Part Status=Active, PartId=12060, Price=0.05, Resistance="100 kOhms", Series="MCT - Professional", Size / Dimension="0.061\" L x 0.033\" W (1.55mm x 0.85mm)", Supplier 1=DigiKey
R4 R8: library part RK73H2BTTD5100F, "RES 510 OHM 1% 1/4W 1206", Device Package="1206 (3216 Metric)", Manufacturer="KOA Speer Electronics, Inc.", Operating Temperature="-55°C ~ 155°C", Power (Watts)="0.25W, 1/4W", Ratings=AEC-Q200, Supplier Device Package=1206, Supplier Part Number 1=2019-RK73H2BTTD5100FCT-ND, Temperature Coefficient=±100ppm/°C, Tolerance=±1%, ComponentLink1Description=Datasheet, ComponentLink1URL=http://www.koaspeer.com/catimages/Products/RK73H/RK73H.pdf, ComponentLink2Description="DigiKey Link", ComponentLink2URL=http://digikey.com/product-detail/en/koa-speer-electronics-inc/RK73H2BTTD5100F/2019-RK73H2BTTD5100FCT-ND/10237859, Composition="Thick Film", Features="Automotive AEC-Q200, Moisture Resistant", Height - Seated (Max)="0.028\" (0.70mm)", LastUpdated="2.09.2020 01:12:38", Lifecycle Status=Active, Minimum Order=1, Number of Terminations=2, Package / Case="1206 (3216 Metric)", Packaging=TapeAndReel, Part Number=RK73H2BTTD5100F, Part Status=Active, PartId=40153, Price=0.01, Resistance="510 Ohms", Series=RK73H, Size / Dimension="0.126\" L x 0.063\" W (3.20mm x 1.60mm)", Supplier 1=DigiKey
R5 R6: library part RP73PF1J20RBTDF, "RES SMD 20 OHM 0.1% 1/6W 0603", Device Package="0603 (1608 Metric)", Manufacturer="TE Connectivity Passive Product", Operating Temperature="-55°C ~ 155°C", Power (Watts)="0.167W, 1/6W", Supplier Device Package=0603, Supplier Part Number 1=A109945CT-ND, Temperature Coefficient=±25ppm/°C, Tolerance=±0.1%, ComponentLink1Description=Datasheet, ComponentLink1URL=https://www.te.com/commerce/DocumentDelivery/DDEController?Action=srchrtrv&DocNm=1773272&DocType=DS&DocLang=English, ComponentLink2Description="DigiKey Link", ComponentLink2URL=http://digikey.com/product-detail/en/te-connectivity-passive-product/RP73PF1J20RBTDF/A109945CT-ND/4034300, Composition="Thin Film", Height - Seated (Max)="0.022\" (0.55mm)", LastUpdated="2.09.2020 01:09:51", Lifecycle Status=Active, Minimum Order=1, Number of Terminations=2, Package / Case="0603 (1608 Metric)", Packaging=TapeAndReel, Part Number=RP73PF1J20RBTDF, Part Status=Active, PartId=20638, Price=0.14, Resistance="20 Ohms", Series="RP73P, Holsworthy", Size / Dimension="0.061\" L x 0.031\" W (1.55mm x 0.80mm)", Supplier 1=DigiKey
R7: library part AT0603FRE074K7L, "RES SMD 4.7K OHM 1% 1/10W 0603", Device Package="0603 (1608 Metric)", Manufacturer=Yageo, Operating Temperature="-55°C ~ 155°C", Power (Watts)="0.1W, 1/10W", Ratings=AEC-Q200, Supplier Device Package=0603, Supplier Part Number 1=YAG2130CT-ND, Temperature Coefficient=±50ppm/°C, Tolerance=±1%, ComponentLink1Description=Datasheet, ComponentLink1URL=http://www.yageo.com/documents/recent/PYu-AT_51_RoHS_L_5.pdf, ComponentLink2Description="DigiKey Link", ComponentLink2URL=http://digikey.com/product-detail/en/yageo/AT0603FRE074K7L/YAG2130CT-ND/5139578, Composition="Thin Film", Features="Anti-Sulfur, Automotive AEC-Q200, Moisture Resistant", Height - Seated (Max)="0.022\" (0.55mm)", LastUpdated="2.09.2020 01:10:12", Lifecycle Status=Active, Minimum Order=1, Number of Terminations=2, Package / Case="0603 (1608 Metric)", Packaging=TapeAndReel, Part Number=AT0603FRE074K7L, Part Status=Active, PartId=11385, Price=0.02, Resistance="4.7 kOhms", Series=AT, Size / Dimension="0.063\" L x 0.031\" W (1.60mm x 0.80mm)", Supplier 1=DigiKey
R9 R10: library part TNPW12062M00BEEN, "RES 2M OHM 0.1% 1/4W 1206", Device Package="1206 (3216 Metric)", Manufacturer="Vishay Dale", Operating Temperature="-55°C ~ 155°C", Power (Watts)="0.4W, 2/5W", Ratings=AEC-Q200, Supplier Device Package=1206, Supplier Part Number 1=541-3864-1-ND, Temperature Coefficient=±25ppm/°C, Tolerance=±0.1%, ComponentLink1Description=Datasheet, ComponentLink1URL=http://www.vishay.com/docs/28758/tnpw_e3.pdf, ComponentLink2Description="DigiKey Link", ComponentLink2URL=http://digikey.com/product-detail/en/vishay-dale/TNPW12062M00BEEN/541-3864-1-ND/7355222, Composition="Thin Film", Features="Anti-Sulfur, Automotive AEC-Q200, Moisture Resistant", Height - Seated (Max)="0.026\" (0.65mm)", LastUpdated="2.09.2020 01:12:49", Lifecycle Status=Active, Minimum Order=1, Number of Terminations=2, Package / Case="1206 (3216 Metric)", Packaging=TapeAndReel, Part Number=TNPW12062M00BEEN, Part Status=Active, PartId=35658, Price=0.60, Resistance="2 MOhms", Series="TNPW e3", Size / Dimension="0.126\" L x 0.063\" W (3.20mm x 1.60mm)", Supplier 1=DigiKey
S1: "SWITCH TACTILE SPST-NO 0.05A 24V", Contact Rating @ Voltage="0.05A @ 24VDC", Manufacturer="TE Connectivity ALCOSWITCH Switches", Operating Force=160gf, Operating Temperature="-35°C ~ 85°C", Supplier Part Number 1=450-1759-1-ND, Actuator Height off PCB, Vertical=5.00mm, Actuator Orientation="Top Actuated", Actuator Type=Standard, Circuit=SPST-NO, ComponentLink1Description=Datasheet, ComponentLink1URL=https://www.te.com/commerce/DocumentDelivery/DDEController?Action=srchrtrv&DocNm=1308111-1_SWITCHES_CORE_PROGRAM_CATALOG&DocType=CS&DocLang=English, ComponentLink2Description="DigiKey Link", ComponentLink2URL=http://digikey.com/product-detail/en/te-connectivity-alcoswitch-switches/FSM4JSMATR/450-1759-1-ND/2271638, LastUpdated="2.09.2020 01:27:07", Lifecycle Status=Active, Minimum Order=1, Mounting Type="Surface Mount", Outline="6.00mm x 6.00mm", Packaging=TapeAndReel, Part Number=FSM4JSMATR, Part Status=Active, Price=0.17, Series=FSMJSMA, Supplier 1=DigiKey, Switch Function=Off-Mom, Termination Style="Gull Wing", Illumination=Non-Illuminated
SERVO-1/SERVO-2: library part "2X3 BOOT HDR"
U1: "Buck Switching Regulator IC Positive Fixed 5V 1 Output 3A TO-263-6, DÂ²Pak _5 Leads + Tab_, TO-263BA", Package="TO-263-5 Micrel", Availability=Unavailable, MF=Microchip, MP=LM2576-5.0WU, Price=None, SnapEDA_Link=https://www.snapeda.com/parts/LM2576-5.0WU/Microchip/view-part/104848/?ref=snap
U2: "UNO PLUS Arduino R3 Shield, Xbee Arduino IDE Wheeled Robotics Kit", Package="SOT-223 Seeed Technology", Availability=Unavailable, MF="Seeed Technology", MP=AMS1117, Price=None, SnapEDA_Link=https://www.snapeda.com/parts/AMS1117/Seeed%20Technology%20Co.%2C%20Ltd/view-part/184428/?ref=snap
Y1: library part ABS07-120-32.768KHZ-T, "CRYSTAL 32.7680KHZ 6PF SMD", ESR (Equivalent Series Resistance)="55 kOhms", Frequency Tolerance=±20ppm, Load Capacitance=6pF, Manufacturer="Abracon LLC", Operating Mode=Fundamental, Operating Temperature="-40°C ~ 85°C", Package / Case="2-SMD, No Lead", Supplier Part Number 1=535-11937-1-ND, ComponentLink1Description=Datasheet, ComponentLink1URL=https://abracon.com/Resonators/ABS07-120-32.768kHz-T.pdf, ComponentLink2Description="DigiKey Link", ComponentLink2URL=http://digikey.com/product-detail/en/abracon-llc/ABS07-120-32.768KHZ-T/535-11937-1-ND/3724046, Frequency=32.768kHz, Height - Seated (Max)="0.035\" (0.90mm)", LastUpdated="2.09.2020 01:21:47", Lifecycle Status=Active, Minimum Order=1, Mounting Type="Surface Mount", Packaging=TapeAndReel, Part Number=ABS07-120-32.768KHZ-T, Part Status=Active, PartId=385, Price=0.39, Series=ABS07, Size / Dimension="0.126\" L x 0.059\" W (3.20mm x 1.50mm)", Supplier 1=DigiKey, Type="kHz Crystal (Tuning Fork)"
Y2: library part ABLS-8.000MHZ-B2-T, "CRYSTAL 8.0000MHZ 18PF SMD", ESR (Equivalent Series Resistance)="80 Ohms", Frequency Stability=±50ppm, Frequency Tolerance=±20ppm, Load Capacitance=18pF, Manufacturer="Abracon LLC", Operating Mode=Fundamental, Operating Temperature="-20°C ~ 70°C", Package / Case=HC-49/US, Supplier Part Number 1=535-9089-1-ND, ComponentLink1Description=Datasheet, ComponentLink1URL=https://abracon.com/Resonators/abls.pdf, ComponentLink2Description="DigiKey Link", ComponentLink2URL=http://digikey.com/product-detail/en/abracon-llc/ABLS-8.000MHZ-B2-T/535-9089-1-ND/675606, Frequency=8MHz, Height - Seated (Max)="0.165\" (4.20mm)", LastUpdated="2.09.2020 01:21:45", Lifecycle Status=Active, Minimum Order=1, Mounting Type="Surface Mount", Packaging=TapeAndReel, Part Number=ABLS-8.000MHZ-B2-T, Part Status=Active, PartId=133, Price=0.24, Series=ABLS, Size / Dimension="0.449\" L x 0.185\" W (11.40mm x 4.70mm)", Supplier 1=DigiKey, Type="MHz Crystal"

## Free pads (board coordinates)
  round 5.5 hole 5.5 unplated: MNT_H(-35,0) MNT_H(0,-35) MNT_H(0,35) MNT_H(35,0)

## Via types
v1: diameter 0.8, hole 0.4, Top Layer to Bottom Layer, 53 vias
v2: diameter 0.6, hole 0.3, Top Layer to Bottom Layer, 1 vias

## Nets (pads, with @x,y where several pads share a name; then routed paths per layer and width w, separated by ;. In a path a pad name is that pad's centre, name@x,y a point inside that pad or via, vN(x,y) a via of type N, cw(c..) or ccw(c..) an arc to the next point about the centre after c; other vN are vias at no path point)
+5: ALTIMU.2 C11.1 C12.1 C13.2 D1.2 ESP32.1 GPS.1 L1.2 R7.1 SERVO-1/SERVO-2.1 U1.4 U2.3 | length 210
  Top Layer w0.508: v1(14.225,-2.6) 14.225,-5.275 16.625,-7.675 v2(22.275,-7.675)
  Bottom Layer w0.508: ALTIMU.2 -26.427,-21.673 -23.575,-24.525 -23.575,-30.475 ; -23.613,-30.512 -17.441,-36.684 GPS.1 -11.645,-38.85 6.1,-38.85 8.6,-36.35 20.225,-36.35 24.125,-32.45 ESP32.1 24.125,-9.525 v2(22.275,-7.675) ; R7.1 -5.675,17.225 D1.2 0.125,23.025 L1.2 0.125,27.54 SERVO-1/SERVO-2.1@6.285,33.7 ; R7.1@-5.296,16 v1@-2.925,16 ; D1.2@-4.921,17.975 v1@-2.55,17.975 ; L1.2@0.554,24.1 v1@2.925,24.1 ; v1(1.975,7.475) 2,7.45 C12.1 7.849,7.45 C13.2 ; SERVO-1/SERVO-2.1@6.285,36.24 SERVO-1/SERVO-2.1@6.285,33.7 ; v1(9.9,7.5) 9.925,7.475 C13.2 ; v1(14.225,-2.6) 14.26,-2.565 U2.3 14.26,2.465 ; v1(16.85,34.125) 16.9,34.075 C11.1 15.104,31.704 ; U1.4 14.25,25.05 ; U1.4@17.679,25.1 v1@20.05,25.1 ; SERVO-1/SERVO-2.1@6.285,33.7 8.281,31.704 15.104,31.704 ; C13.2 11.351,5.374 14.26,2.465 ; 14.25,25.05 12.95,23.75 12.95,6.175 14.26,4.865 14.26,2.465 ; 14.25,25.05 13.425,25.875 13.425,30.025 15.104,31.704
  other v1: -2.875,16.05 -2.5,18.025 2.975,24.15 20.1,25.15
+9: 9V.1 C10.1 R9.2 U1.1 | length 64.3
  Bottom Layer w0.762: v1(0.75,-4.475) 0.777,-4.502 R9.2 2.379,-5.1 4.3,-5.1 8.275,-9.075 15.4,-9.075 v1(18.175,-6.3) 15.9,-4.025 15.9,-1.975 15.35,-1.425 15.35,5.875 14.075,7.15 14.075,9.725 15.175,10.825 19.9,10.825 21.125,12.05 C10.1 ; v1(16.95,18.275) 16.935,18.29 U1.1 19.525,19.95 21.125,18.35 C10.1 ; v1(23.75,15.075) 23.671,14.996 C10.1
ADC12_IN0: IC1.10 R9.1 R10.2 | length 37.6
  Top Layer w0.305: v1(-9.975,-25.775) -9.458,-25.775 -8.466,-24.784 IC1.10
  Bottom Layer w0.254: R10.2 -5.298,-7.777 -4.425,-8.65 -0.15,-8.65 2.15,-8.65 3.577,-7.223 R9.1
  Bottom Layer w0.305: v1(-9.975,-25.775) -10.775,-24.975 -10.775,-10.775 -6.701,-6.701 R10.2
BOOT0: IC1.44 R2.2 | length 13.5
  Top Layer w0.305: v1(-3.675,-16.8) -3.675,-16.85 -3.25,-17.275 IC1.44
  Bottom Layer w0.305: v1(-3.675,-16.8) 2.5,-16.8 5.35,-19.65 R2.2
BOOT1: IC1.20 R3.2 | length 27.4
  Top Layer w0.305: v1(-1.955,-28.725) -1.929,-28.725 -1.75,-28.546 IC1.20@-1.75,-27.216
  Bottom Layer w0.305: v1(-1.955,-28.725) -1.66,-28.725 -0.297,-30.087 4.287,-30.087 7.3,-27.075 13.475,-27.075 18.85,-21.7 R3.2
BUZZER: BUZ1.1 IC1.21 | length 45.5
  Top Layer w0.305: v1(-1.775,-30.1) -1.775,-30.075 -1.25,-29.55 IC1.21
  Bottom Layer w0.305: v1(-1.775,-30.1) -2.625,-30.1 -3.125,-29.6 -3.125,-27.875 -2.095,-26.845 -2.095,-20.005 -4.5,-17.6 -4.5,-16.45 -3.8,-15.75 13.025,-15.75 18.35,-10.425 BUZ1.1
DATA_LED: IC1.22 R8.1 | length 32.8
  Top Layer w0.305: v1(-0.8,-30.725) -0.75,-30.675 IC1.22
  Bottom Layer w0.305: v1(-0.8,-30.725) 0.65,-30.725 5.35,-35.425 18.5,-35.425 20.1,-33.825 20.1,-31.075 19.05,-30.025 R8.1
GND: 9V.2 "BATTERY HOLDER.N" ALTIMU.3 BUZ1.2 C1.1 C2.1 C3.2 C4.2 C5.1 C6.1 C7.1 C8.1 C9.1 C10.2 C11.2 C12.2 C13.1 C14.2 C15.1 D2.1 D3.2 D4.2 DEBUGGER.5 ESP32.4 GPS.4 H1.2 IC1.8 IC1.23 IC1.35 IC1.47 J2.4 J2.5 R10.1 S1.1 S1.2 SERVO-1/SERVO-2.2 U1.3 U1.5 U2.1 | length 25.5
  Top Layer w0.254: J2.5 v1@-16.675,19.412 ; J2.4 -16.675,20.331 v1@-16.675,19.412 ; v1(-16.675,19.35) v1@-16.675,19.412 ; IC1.8 -5.809,-23.784 -5.6,-23.575 -5.6,-22.75 -4.85,-22 -3.825,-22 v1(-3.8,-22.025) ; IC1.47 -4.75,-20.475 -3.925,-21.3 v1(-2.8,-21.3) ; v1(-1.275,-22.075) -1.275,-21.4 -0.659,-20.784 IC1.35 ; v1(-1.2,-23.775) -0.25,-24.725 IC1.23
  Top Layer w0.508: S1.1 -7.1,-8.7 v1(-7.075,-8.675) ; v1@2,-11.4 S1.2@2,-9.95 ; v1@4.475,-32.875 D3.2@5.925,-32.875 ; v1@18.125,-34.225 D4.2@18.125,-32.775
  other v1: 18.1,-34.25 4.45,-32.85 1.975,-11.425
I2C1_SCL: ALTIMU.5 IC1.42 | length 51.5
  Top Layer w0.305: v1(-8.101,-18.125) -8.101,-17.251 -7.125,-16.275 -5.732,-16.275 -4.925,-15.468 -2.8,-15.468 -2.25,-16.018 IC1.42
  Bottom Layer w0.305: ALTIMU.5 -28.283,-14.767 -15.675,-27.375 -8.85,-27.375 -7.25,-25.775 -7.25,-21.9 -8.101,-21.049 v1(-8.101,-18.125)
I2C1_SDA: ALTIMU.4 IC1.43 | length 49.5
  Top Layer w0.305: v1(-7.149,-18.125) -7.149,-17.274 -6.65,-16.775 -5.525,-16.775 -4.675,-15.925 -3.05,-15.925 -2.75,-16.225 IC1.43
  Bottom Layer w0.305: ALTIMU.4 -28.263,-17.069 -16.85,-28.482 -8.625,-28.482 -6.45,-26.307 -6.45,-21.375 -7.149,-20.676 v1(-7.149,-18.125)
NetD1_1: D1.1 J2.1 | length 10.2
  Top Layer w0.254: J2.1 -15.487,21.9 -13.7,21.9 v1(-13.6,22)
  Bottom Layer w0.254: v1(-13.6,22) -12.25,20.65 -11.65,20.05 -9.8,20.05 D1.1
NetD2_2: D2.2 L1.1 U1.2 | length 21.8
  Top Layer w0.508: v1(10.3,19.85) 13.525,16.625 v1(14.15,16.625)
  Bottom Layer w0.508: v1(10.3,19.85) 10.3,23.825 L1.1 ; D2.2 15.179,14.146 14.15,15.175 v1(14.15,16.625) 14.15,21.1 14.7,21.65 U1.2
NetD3_1: D3.1 R4.2 | length 5.2
  Top Layer w0.305: D3.1@9.791,-32.85 v1(11.3,-32.85)
  Bottom Layer w0.305: R4.2 10.409,-30.284 11.3,-31.175 v1(11.3,-32.85)
NetD4_1: D4.1 R8.2 | length 5.2
  Top Layer w0.305: v1(12.85,-32.875) D4.1@14.359,-32.875
  Bottom Layer w0.305: v1(12.85,-32.875) 12.85,-31.2 13.741,-30.309 R8.2@14.45,-30.309
NetH1_3: H1.3 R2.1 | length 3.7
  Bottom Layer w0.305: R2.1 H1.3
NetH1_4: H1.4 R3.1 | length 6.9
  Top Layer w0.254: H1.4 12.95,-20.825 14.55,-20.825 16.1,-19.275 v1(17.625,-19.275)
  Bottom Layer w0.254: R3.1 17.55,-19.35 v1(17.625,-19.275)
NetJ2_2: J2.2 R5.1 | length 7.6
  Top Layer w0.254: J2.2 -15.606,21.1 -14.975,21.1 v1(-14.875,21.2)
  Bottom Layer w0.254: v1(-14.875,21.2) -13.525,19.85 -13.025,19.85 R5.1
NetJ2_3: J2.3 R6.1 | length 7.3
  Top Layer w0.254: J2.3 -15.55,20.125 v1(-15.55,20.1)
  Bottom Layer w0.254: v1(-15.55,20.1) -15.375,20.1 -14.025,18.75 -13.425,18.15 -11.96,16.685 R6.1
NRST: C5.2 DEBUGGER.2 IC1.7 R1.1 S1.3 S1.4 | length 86.5
  Top Layer w0.305: v1(-8.45,-23.675) -8.059,-23.284 IC1.7 ; S1.3 v1(-2.95,-14.65) S1.4 ; v1(10.35,-12.05) 10.375,-12.025 10.375,-4.4 22.665,7.89 DEBUGGER.2
  Bottom Layer w0.305: v1(-8.45,-23.675) -9.375,-22.75 -9.375,-14.025 -6.4,-11.05 -4.125,-11.05 -3.85,-11.325 -3.85,-12.375 R1.1 ; C5.2 R1.1 ; v1(10.35,-12.05) 7.75,-14.65 v1(-2.95,-14.65) -3.95,-13.65 R1.1
OSC_32_IN: C1.2 IC1.3 Y1.2 | length 15.5
  Top Layer w0.305: v1(-14.8,-11.925) -13.704,-11.925 Y1.2 ; -11.229,-13.2 -10.35,-13.2 -9.3,-14.25 -9.3,-19.8 -7.816,-21.284 IC1.3
  Bottom Layer w0.305: C1.2@-14.825,-13.274 v1@-14.825,-11.95
OSC_32_OUT: C2.2 IC1.4 Y1.1 | length 14.1
  Top Layer w0.305: v1(-14.875,-17.05) -13.579,-17.05 Y1.1 ; -11.229,-15.6 -10.025,-15.6 -9.764,-15.861 -9.764,-20.344 -8.325,-21.784 IC1.4
  Bottom Layer w0.305: v1@-14.85,-17.025 C2.2@-14.85,-15.701
OSC_IN: C3.1 IC1.5 Y2.2 | length 12.5
  Top Layer w0.305: v1(-16.7,-19.5) -14.749,-19.5 Y2.2 -10.876,-20.849 -9.441,-22.284 IC1.5
  Bottom Layer w0.305: C3.1 -16.725,-19.525 v1(-16.7,-19.5)
OSC_OUT: C4.1 IC1.6 Y2.1 | length 16.9
  Top Layer w0.305: v1(-16.7,-31.675) -14.726,-31.675 Y2.1 -13.4,-27.025 -9.159,-22.784 IC1.6
  Bottom Layer w0.305: v1@-16.675,-31.65 C4.1@-16.675,-30.326
SERVO1: IC1.39 SERVO-1/SERVO-2.3 | length 58.5
  Top Layer w0.305: IC1.39 -0.75,-17.293 0.193,-16.35 3.775,-16.35 6.225,-13.9 6.225,28.882 8.825,31.482 SERVO-1/SERVO-2.3
SERVO2: IC1.38 SERVO-1/SERVO-2.4 | length 62.4
  Top Layer w0.305: IC1.38 -0.25,-17.5 0.4,-16.85 4.75,-16.85 7.125,-14.475 7.125,27.4 10.075,30.35 10.075,34.99 SERVO-1/SERVO-2.4
SWCLK: DEBUGGER.4 IC1.37 | length 55.2
  Top Layer w0.305: IC1.37 0.25,-17.875 0.675,-17.45 5.15,-17.45 7.925,-14.675 7.925,-4.1 24.995,12.97 DEBUGGER.4
SWDIO: DEBUGGER.3 IC1.34 | length 53.8
  Top Layer w0.305: IC1.34 3.716,-21.284 8.925,-16.075 8.925,-4.475 23.83,10.43 DEBUGGER.3
USART1_RX: ESP32.3 IC1.31 | length 27.6
  Top Layer w0.305: IC1.31 5.616,-22.784 8.707,-25.875 26.984,-25.875 ESP32.3
USART1_TX: ESP32.2 IC1.30 | length 26.3
  Top Layer w0.305: IC1.30 5.409,-23.284 8.5,-26.375 23.892,-26.375 ESP32.2
USART2_RX: GPS.3 IC1.13 | length 10.8
  Top Layer w0.305: GPS.3 -8.731,-33.681 -5.25,-30.2 IC1.13
USART2_TX: GPS.2 IC1.12 | length 13.8
  Top Layer w0.305: GPS.2 -11.271,-34.371 -9.675,-32.775 -9.675,-27.025 -8.434,-25.784 IC1.12
USB_D_N: IC1.32 R5.2 | length 64.2
  Top Layer w0.254: IC1.32 6.249,-22.284 8.75,-19.782 8.75,-17.975 12.85,-13.875 12.85,-7.353 v1(12.098,-6.602)
  Bottom Layer w0.254: R5.2 -7.725,14.55 -7.725,7.675 2.275,-2.325 12.15,-2.325 14.275,-4.45 14.275,-6.075 13.748,-6.602 v1(12.098,-6.602)
USB_D_P: IC1.33 R6.2 R7.2 | length 66.9
  Top Layer w0.254: v1(-11.525,13.9) -10.6,12.975 -7.225,12.975 -6.575,13.625 v1(-6.575,14.575) ; IC1.33 6.041,-21.784 8.25,-19.575 8.25,-17.768 12.35,-13.668 12.35,-8.2 v1(11.425,-7.275)
  Bottom Layer w0.254: v1(-11.525,13.9) -11.525,15.031 R6.2 -8.35,12.825 -8.35,7.3 1.9,-2.95 4.075,-2.95 8.4,-7.275 v1(11.425,-7.275) ; R7.2 -6.975,14.975 v1(-6.575,14.575)
VBAT: "BATTERY HOLDER.P" IC1.1 | length 24.2
  Top Layer w0.305: -20.45,-13.625 -20.45,-11.6 -18.7,-9.85 -12.425,-9.85 -8.85,-13.425 -8.85,-14.053 -8.843,-14.061 -8.843,-19.257 -7.816,-20.284 IC1.1
VCC: C6.2 C7.2 C8.2 C9.2 C14.1 C15.2 DEBUGGER.1 H1.1 IC1.9 IC1.24 IC1.36 IC1.48 R1.2 R4.1 U2.2 U2.4 | length 143.2
  Top Layer w0.254: v1(-4.35,-29.025) -1.675,-31.7 0.2,-31.7 2.725,-29.175 ; IC1.24 0.25,-28.775 0.65,-29.175 2.725,-29.175 ; v1(8.125,-28.675) 5.1,-28.675 4.6,-29.175 2.725,-29.175
  Top Layer w0.305: IC1.9 -5.225,-24.284 -4.725,-23.784 v1(-4.725,-23.025) ; IC1.48@-5.241,-18.975 v1@-5.241,-17.684 ; IC1.36 3.041,-20.284 v1(3.075,-20.25) ; v1(3,-27.65) 4.075,-27.65 5.1,-28.675
  Top Layer w0.508: H1.1@10.375,-18.25 H1.1@12.915,-18.25
  Bottom Layer w0.254: C7.2 -5.25,-22.5 v1(-4.725,-23.025) ; R4.1 6.9,-29.9 v1(8.125,-28.675)
  Bottom Layer w0.305: v1(-5.275,-17.65) -6.05,-18.425 -6.05,-19.583 C7.2 ; v1(-4.725,-23.025) -4.625,-23.125 -4.625,-24.05 C8.2 ; C6.2 0.684,-19.55 2.375,-19.55 v1(3.075,-20.25) ; C9.2 2.416,-27.65 v1(3,-27.65)
  Bottom Layer w0.508: v1(-5.275,-17.65) -5.275,-12.5 R1.2 ; C8.2 -5.075,-24.175 -5.575,-24.675 -5.575,-27.35 -5.6,-27.375 -5.6,-27.775 v1(-4.35,-29.025) ; C9.2 3.075,-22.659 3.075,-22.55 ; v1(3.075,-20.25) 3.075,-22.55 ; H1.1@10.375,-18.25 12.915,-18.25 14.6,-18.25 15.737,-17.113 ; U2.4 U2.2 ; DEBUGGER.1 32.675,5.35 29.024,1.699 C14.1 25.352,1.699 23.276,3.774 C15.2 18.694,3.774 U2.2 ; 3.075,-22.55 5.675,-25.15 13.575,-25.15 15.737,-22.988 15.737,-17.113 ; 15.737,-17.113 20.775,-12.075 20.775,-2.075 19.375,-0.675 17.8,-0.675 16.55,0.575 U2.2
pads on no net: ALTIMU.1 IC1.2 IC1.11 IC1.14 IC1.15 IC1.16 IC1.17 IC1.18 IC1.19 IC1.25 IC1.26 IC1.27 IC1.28 IC1.29 IC1.40 IC1.41 IC1.45 IC1.46 J2.S

## Polygon pours and split planes (outlines as drawn)
GND on Bottom Layer "Top Layer-No Net" (solid, remove dead copper, pour order 0): -21.412,36.725 -18.263,38.425 -15.938,39.4 -13.313,40.425 -11.312,40.975 -8.963,41.55 -7.688,41.85 -2.538,42.45 -0.713,42.525 2.013,42.475 4.537,42.3 6.937,41.95 9.962,41.35 12.537,40.65 14.412,40.025 17.662,38.7 21.888,36.475 25.137,34.3 27.337,32.575 29.887,30.25 32.137,27.825 33.687,25.975 35.362,23.6 37.462,20.125 38.937,17.15 40.287,13.65 41.487,9.3 42.237,5.225 42.512,1.025 42.487,-1.725 42.287,-4.7 42.012,-6.65 41.487,-9.3 40.738,-12.15 39.887,-14.65 38.687,-17.6 37.663,-19.75 36.287,-22.175 34.762,-24.45 33.587,-26.05 32.687,-27.125 31.487,-28.55 29.837,-30.275 27.463,-32.45 25.837,-33.7 23.663,-35.275 21.187,-36.85 18.062,-38.475 16.462,-39.15 14.062,-40.075 11.562,-40.875 9.112,-41.5 7.562,-41.825 6.062,-42.075 3.988,-42.3 2.688,-42.4 1.137,-42.475 -0.587,-42.5 -2.963,-42.4 -5.813,-42.075 -10.313,-41.225 -14.813,-39.85 -17.512,-38.7 -20.663,-37.15 -23.862,-35.15 -26.688,-33.1 -29.112,-30.95 -31.338,-28.675 -32.363,-27.525 -33.663,-25.925 -35.488,-23.35 -37.713,-19.575 -39.112,-16.6 -39.763,-15.05 -40.913,-11.375 -41.612,-8.65 -42.188,-5.4 -42.463,-1.425 -42.463,1.125 -42.337,3.65 -42.088,5.95 -41.662,8.575 -40.963,11.325 -39.713,15.15 -38.113,18.9 -36.538,21.65 -34.787,24.45 -32.613,27.25 -29.613,30.525 -26.362,33.35 -23.237,35.6 -21.412,36.7
+5 on Top Layer "NONET_L-01_P-001" (solid, pour order 6): 10.4,7.2 10.4,4.75 2.075,4.75 -3.8,10.625 -3.8,20.1 4.5,28.4 4.5,37.35 5.125,37.975 5.175,37.925 14.75,37.925 21.8,30.875 21.8,24.075 17.575,19.85 12.25,19.85 12.25,9.05
+9 on Top Layer "NONET_L-01_P-001" (solid, pour order 5): 15.825,19.075 21.75,19.075 25.275,15.55 25.175,15.45 25.175,-2.55 30.075,-2.55 32.25,-4.725 35.825,-4.725 35.825,-9.525 4.125,-9.525 -0.475,-4.925 -0.475,-0.825 9.325,-0.825 15.825,5.675
GND on Top Layer "NONET_L-01_P-001" (solid, pour order 2): 19.675,-11 19.675,-35.1 17.65,-37.125 -18.125,-37.125 -18.125,-33.5 -21.775,-29.85 -20.775,-28.85 -20.775,-11
no net on Top Layer "NONET_L-01_P-001" (solid, pour order 1): -24.65,-5.1

## Keep-outs
Keep-Out Layer:
  lines w0.254: -42.4,2.95 -3.025,42.425 ; -42.398,2.95 ccw(c0,0) -3.023,42.392

## Silkscreen, mask and mechanical layers (free items; w line width, h text height)
Top Overlay:
  drawing of 1098 lines, arcs and shapes, not listed
  text "MICRO USB" at -14.637,25.329 h0.76
  text "GND" at 37.598,15.279 h0.51
  text "SWCLK" at 37.09,12.629 h0.51
  text "SWDIO" at 37.132,10.129 h0.51
  text "NRST" at 37.344,7.754 h0.51
  text "VCC" at 37.598,4.979 h0.51
  text "+9V" at 39.621,-8.066 h0.76 r90
  text "+" at 17.375,-12.692 h1.52 r270
  text "GND" at 39.621,-12.791 h0.76 r90
  text "SCL" at -37.324,-15.172 h0.76 r295
  text "SDA" at -36.374,-17.522 h0.76 r295
  text "GND" at -35.074,-19.897 h0.76 r295
  text "+5V" at -34.024,-22.097 h0.76 r295
  text "+5V" at -14.866,-39.296 h0.76
  text "TX" at -11.685,-39.296 h0.76
  text "RX" at -9.31,-39.296 h0.76
  text "GND" at -6.766,-39.296 h0.76
Bottom Overlay:
  text "TM-MARM99 V1.3" at -14.504,-3.021 h1.02
  text "GND" at 32.189,-25.852 h0.76 r45
  text "RX" at 29.994,-27.947 h0.76 r45
  text "TX" at 28.019,-29.822 h0.76 r45
  text "+5V" at 26.489,-31.477 h0.76 r45

## Text inside footprints (layer, text, board x,y; h text height)
"BATTERY HOLDER": Top Overlay "+" at -19.814,-17.439 h1.78 r90
H1: Top Overlay "VCC" at 10.629,-16.218 h0.76; Top Overlay "GND" at 12.661,-25.362 h0.76 r180
SERVO-1/SERVO-2: Top Overlay "+5V" at 4.253,33.954 h0.76 r90; Top Overlay "GND" at 13.397,35.986 h0.76 r270